# EAGLE board DBS (EAGLE 9.6.1)
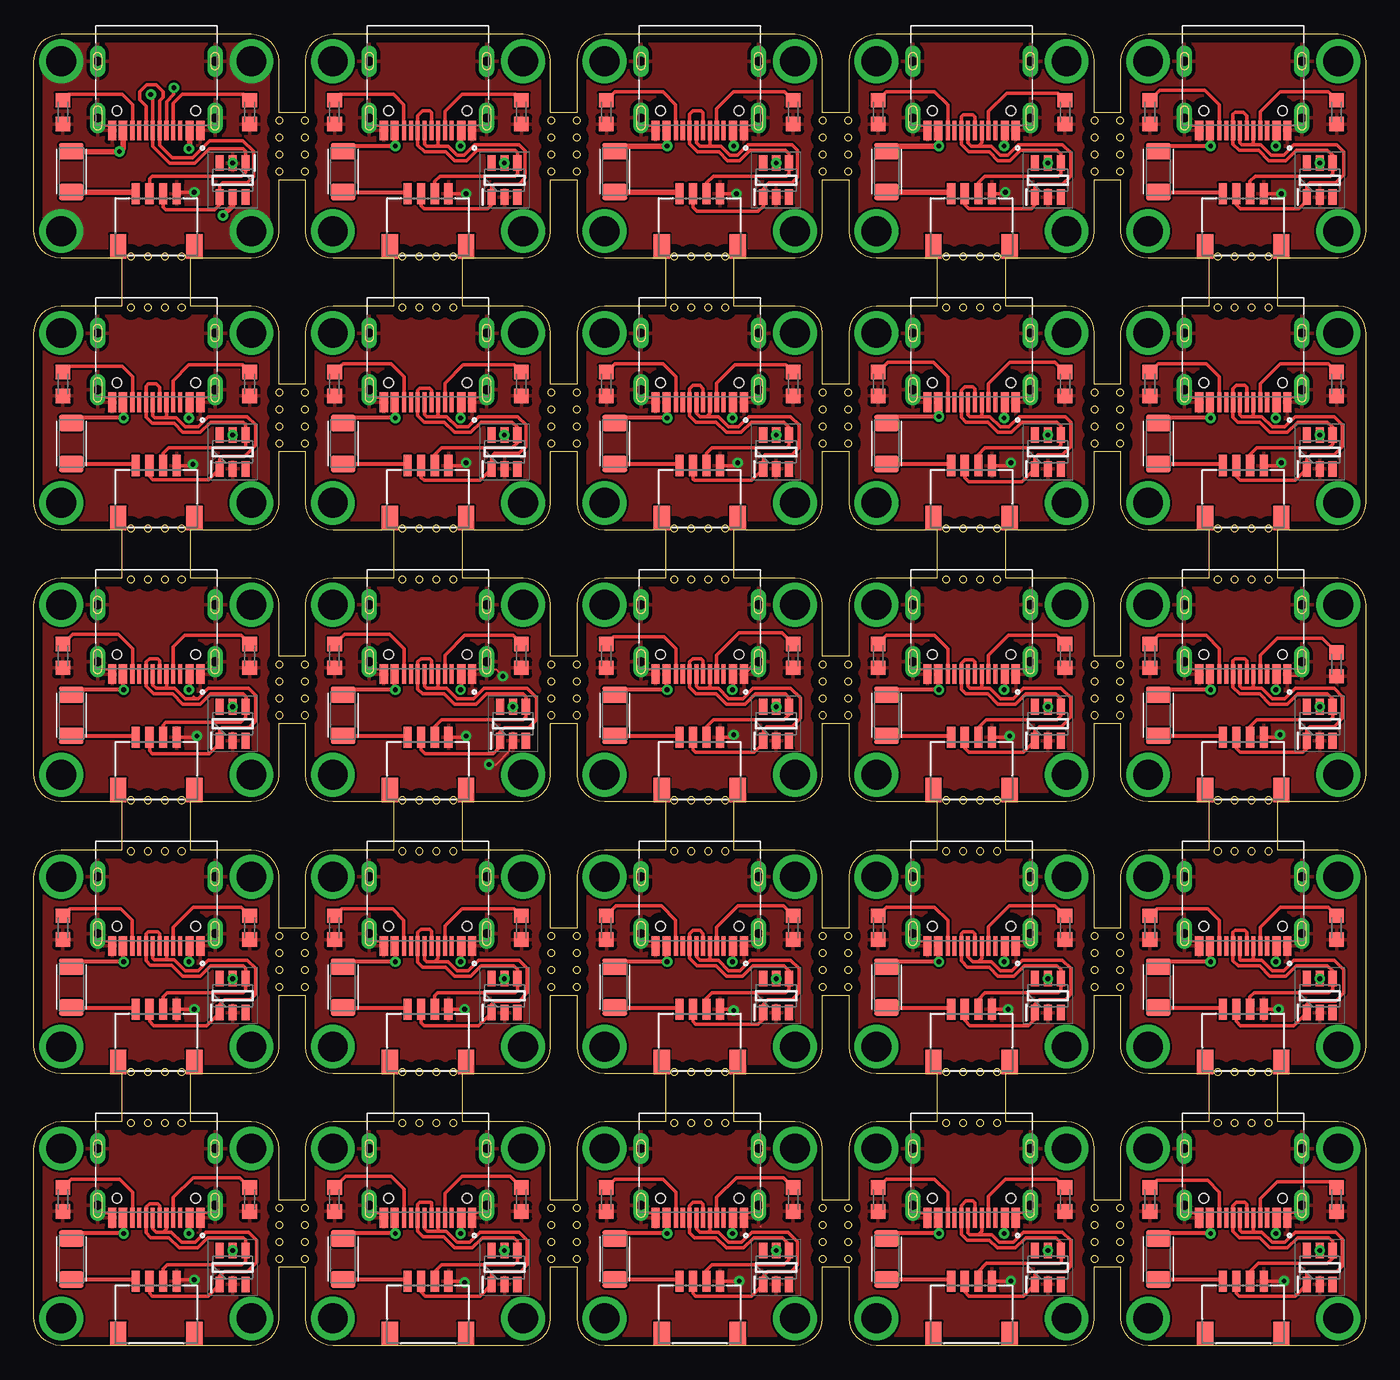
[diagram p0: board, top side]
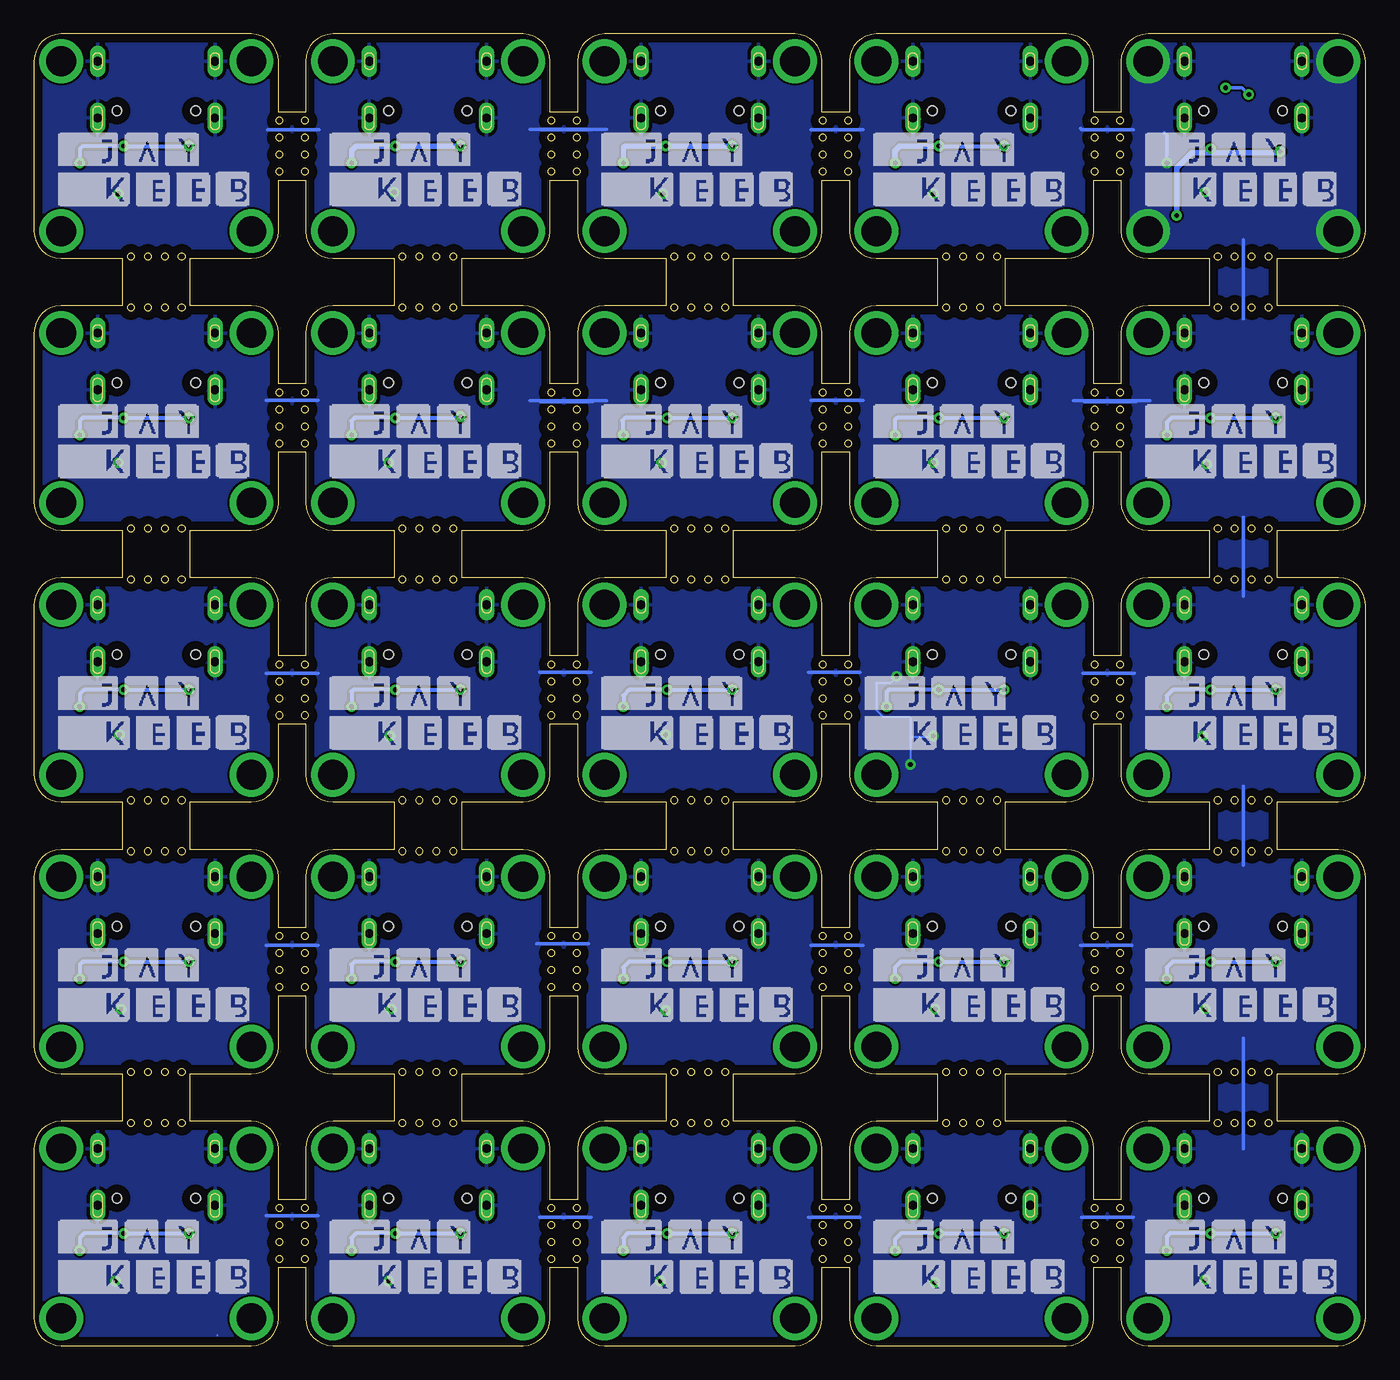
[diagram p1: board, bottom side, seen from below]

Size 98 x 96.5 mm. Coordinates in mm from the lower left corner, seen from the top.
Outline: 1060 segments
Outline: circle at 7.12,80.12 radius 0.25
Outline: circle at 8.37,80.12 radius 0.25
Outline: circle at 9.62,80.12 radius 0.25
Outline: circle at 10.87,80.12 radius 0.25
Outline: circle at 7.12,76.37 radius 0.25
Outline: circle at 8.37,76.37 radius 0.25
Outline: circle at 9.62,76.37 radius 0.25
Outline: circle at 10.87,76.37 radius 0.25
Outline: circle at 7.12,60.12 radius 0.25
Outline: circle at 8.37,60.12 radius 0.25
Outline: circle at 9.62,60.12 radius 0.25
Outline: circle at 10.87,60.12 radius 0.25
Outline: circle at 7.12,56.37 radius 0.25
Outline: circle at 8.37,56.37 radius 0.25
Outline: circle at 9.62,56.37 radius 0.25
Outline: circle at 10.87,56.37 radius 0.25
Outline: circle at 7.12,40.12 radius 0.25
Outline: circle at 8.37,40.12 radius 0.25
Outline: circle at 9.62,40.12 radius 0.25
Outline: circle at 10.87,40.12 radius 0.25
Copper layers (1*16): Top 0.035mm / dielectric 1.5mm / Bottom 0.035mm
Design rules "default *": minimum track width 6mil, minimum drill 0.35mm, track to track 6mil, track to pad 6mil, pad to pad 6mil, via to via 6mil, smd to smd 6mil, copper to edge 25mil, drill to drill 6mil, minimum pad ring 10mil, minimum via ring 8mil, stop-mask expansion 4mil, vias tented up to drill 14mil, thermal gap 10mil

## Footprints (pad centres in the part's own frame; a part is rotated, then mirrored left to right if it is on the bottom)
SOT95P280X145-6N = smd 1.15 x 0.6: 1 -1.25,0.95; 2 -1.25,0; 3 -1.25,-0.95; 4 1.25,-0.95; 5 1.25,0; 6 1.25,0.95
RESC3216X125N = smd 1.2 x 1.82: 1 -1.505,0; 2 1.505,0
HRO_TYPE-C-31-M-12 = smd 0.6 x 1.45: A1B12 -3.25,5.095; A4B9 -2.45,5.095; B1A12 3.25,5.095; B4A9 2.45,5.095 | smd 0.3 x 1.45: A5 -1.25,5.095; A6 -0.25,5.095; A7 0.25,5.095; A8 1.25,5.095; B5 1.75,5.095; B6 0.75,5.095; B7 -0.75,5.095; B8 -1.75,5.095 | drill 0.65 pad 1.05 long: S1 -4.32,4.18; S2 4.32,4.18; S3 -4.32,0; S4 4.32,0 | hole 0.7: -2.89,3.65; 2.89,3.65
R0603 = smd 1.05 x 1.08: 1 -0.875,0; 2 0.875,0
SM04B-SRSS-TB = smd 0.6 x 1.55: 1 1.5,0; 2 0.5,0; 3 -0.5,0; 4 -1.5,0 | smd 1.2 x 1.8: M1 2.8,3.875; M2 -2.8,3.875

## Placement (x,y rotation side)
E1  SRV05-4.TCT  [SOT95P280X145-6N]  14.62,85.75 270 top
E2  SRV05-4.TCT  [SOT95P280X145-6N]  34.62,85.75 90 top
E3  SRV05-4.TCT  [SOT95P280X145-6N]  54.62,85.75 90 top
E4  SRV05-4.TCT  [SOT95P280X145-6N]  74.62,85.75 90 top
E5  SRV05-4.TCT  [SOT95P280X145-6N]  94.62,85.75 90 top
E6  SRV05-4.TCT  [SOT95P280X145-6N]  14.62,65.75 90 top
E7  SRV05-4.TCT  [SOT95P280X145-6N]  34.62,65.75 90 top
E8  SRV05-4.TCT  [SOT95P280X145-6N]  54.62,65.75 90 top
E9  SRV05-4.TCT  [SOT95P280X145-6N]  74.62,65.75 90 top
E10  SRV05-4.TCT  [SOT95P280X145-6N]  94.62,65.75 90 top
E11  SRV05-4.TCT  [SOT95P280X145-6N]  14.62,45.75 90 top
E12  SRV05-4.TCT  [SOT95P280X145-6N]  35.25,45.75 90 top
E13  SRV05-4.TCT  [SOT95P280X145-6N]  54.62,45.75 90 top
E14  SRV05-4.TCT  [SOT95P280X145-6N]  74.62,45.75 90 top
E15  SRV05-4.TCT  [SOT95P280X145-6N]  94.62,45.75 90 top
E16  SRV05-4.TCT  [SOT95P280X145-6N]  14.62,25.75 90 top
E17  SRV05-4.TCT  [SOT95P280X145-6N]  34.62,25.75 90 top
E18  SRV05-4.TCT  [SOT95P280X145-6N]  54.62,25.75 90 top
E19  SRV05-4.TCT  [SOT95P280X145-6N]  74.62,25.75 90 top
E20  SRV05-4.TCT  [SOT95P280X145-6N]  94.62,25.75 90 top
E21  SRV05-4.TCT  [SOT95P280X145-6N]  14.62,5.75 90 top
E22  SRV05-4.TCT  [SOT95P280X145-6N]  34.62,5.75 90 top
E23  SRV05-4.TCT  [SOT95P280X145-6N]  54.62,5.75 90 top
E24  SRV05-4.TCT  [SOT95P280X145-6N]  74.62,5.75 90 top
E25  SRV05-4.TCT  [SOT95P280X145-6N]  94.62,5.75 90 top
F1  500mA  [RESC3216X125N]  2.75,86.37 90 top
F2  500mA  [RESC3216X125N]  22.75,86.37 90 top
F3  500mA  [RESC3216X125N]  42.75,86.37 90 top
F4  500mA  [RESC3216X125N]  62.75,86.37 90 top
F5  500mA  [RESC3216X125N]  82.75,86.37 90 top
F6  500mA  [RESC3216X125N]  2.75,66.37 90 top
F7  500mA  [RESC3216X125N]  22.75,66.37 90 top
F8  500mA  [RESC3216X125N]  42.75,66.37 90 top
F9  500mA  [RESC3216X125N]  62.75,66.37 90 top
F10  500mA  [RESC3216X125N]  82.75,66.37 90 top
F11  500mA  [RESC3216X125N]  2.75,46.37 90 top
F12  500mA  [RESC3216X125N]  22.75,46.37 90 top
F13  500mA  [RESC3216X125N]  42.75,46.37 90 top
F14  500mA  [RESC3216X125N]  62.75,46.37 90 top
F15  500mA  [RESC3216X125N]  82.75,46.37 90 top
F16  500mA  [RESC3216X125N]  2.75,26.37 90 top
F17  500mA  [RESC3216X125N]  22.75,26.37 90 top
F18  500mA  [RESC3216X125N]  42.75,26.37 90 top
F19  500mA  [RESC3216X125N]  62.75,26.37 90 top
F20  500mA  [RESC3216X125N]  82.75,26.37 90 top
F21  500mA  [RESC3216X125N]  2.75,6.37 90 top
F22  500mA  [RESC3216X125N]  22.75,6.37 90 top
F23  500mA  [RESC3216X125N]  42.75,6.37 90 top
F24  500mA  [RESC3216X125N]  62.75,6.37 90 top
F25  500mA  [RESC3216X125N]  82.75,6.37 90 top
J1  TYPE-C-31-M-12  [HRO_TYPE-C-31-M-12]  9,94.5 180 top
J2  TYPE-C-31-M-12  [HRO_TYPE-C-31-M-12]  49,94.5 180 top
J3  TYPE-C-31-M-12  [HRO_TYPE-C-31-M-12]  69,94.5 180 top
J4  TYPE-C-31-M-12  [HRO_TYPE-C-31-M-12]  89,94.5 180 top
J5  TYPE-C-31-M-12  [HRO_TYPE-C-31-M-12]  9,74.5 180 top
J6  TYPE-C-31-M-12  [HRO_TYPE-C-31-M-12]  29,74.5 180 top
J7  TYPE-C-31-M-12  [HRO_TYPE-C-31-M-12]  49,74.5 180 top
J8  TYPE-C-31-M-12  [HRO_TYPE-C-31-M-12]  69,74.5 180 top
J9  TYPE-C-31-M-12  [HRO_TYPE-C-31-M-12]  89,74.5 180 top
J10  TYPE-C-31-M-12  [HRO_TYPE-C-31-M-12]  9,54.5 180 top
J11  TYPE-C-31-M-12  [HRO_TYPE-C-31-M-12]  29,54.5 180 top
J12  TYPE-C-31-M-12  [HRO_TYPE-C-31-M-12]  49,54.5 180 top
J13  TYPE-C-31-M-12  [HRO_TYPE-C-31-M-12]  69,54.5 180 top
J14  TYPE-C-31-M-12  [HRO_TYPE-C-31-M-12]  89,54.5 180 top
J15  TYPE-C-31-M-12  [HRO_TYPE-C-31-M-12]  9,34.5 180 top
J16  TYPE-C-31-M-12  [HRO_TYPE-C-31-M-12]  29,34.5 180 top
J17  TYPE-C-31-M-12  [HRO_TYPE-C-31-M-12]  49,34.5 180 top
J18  TYPE-C-31-M-12  [HRO_TYPE-C-31-M-12]  69,34.5 180 top
J19  TYPE-C-31-M-12  [HRO_TYPE-C-31-M-12]  89,34.5 180 top
J20  TYPE-C-31-M-12  [HRO_TYPE-C-31-M-12]  9,14.5 180 top
J21  TYPE-C-31-M-12  [HRO_TYPE-C-31-M-12]  29,14.5 180 top
J22  TYPE-C-31-M-12  [HRO_TYPE-C-31-M-12]  49,14.5 180 top
J23  TYPE-C-31-M-12  [HRO_TYPE-C-31-M-12]  69,14.5 180 top
J24  TYPE-C-31-M-12  [HRO_TYPE-C-31-M-12]  89,14.5 180 top
J26  TYPE-C-31-M-12  [HRO_TYPE-C-31-M-12]  29,94.5 180 top
R1  5.1k  [R0603]  15.87,90.75 90 top
R2  5.1k  [R0603]  2.12,90.75 270 top
R3  5.1k  [R0603]  35.87,90.75 90 top
R4  5.1k  [R0603]  22.12,90.75 270 top
R5  5.1k  [R0603]  55.87,90.75 90 top
R6  5.1k  [R0603]  42.12,90.75 270 top
R7  5.1k  [R0603]  75.87,90.75 90 top
R8  5.1k  [R0603]  62.12,90.75 270 top
R9  5.1k  [R0603]  95.87,90.75 90 top
R10  5.1k  [R0603]  82.12,90.75 270 top
R11  5.1k  [R0603]  15.87,70.75 90 top
R12  5.1k  [R0603]  2.12,70.75 270 top
R13  5.1k  [R0603]  35.87,70.75 90 top
R14  5.1k  [R0603]  22.12,70.75 270 top
R15  5.1k  [R0603]  55.87,70.75 90 top
R16  5.1k  [R0603]  42.12,70.75 270 top
R17  5.1k  [R0603]  75.87,70.75 90 top
R18  5.1k  [R0603]  62.12,70.75 270 top
R19  5.1k  [R0603]  95.87,70.75 90 top
R20  5.1k  [R0603]  82.12,70.75 270 top
R21  5.1k  [R0603]  15.87,50.75 90 top
R22  5.1k  [R0603]  2.12,50.75 270 top
R23  5.1k  [R0603]  35.87,50.75 90 top
R24  5.1k  [R0603]  22.12,50.75 270 top
R25  5.1k  [R0603]  55.87,50.75 90 top
R26  5.1k  [R0603]  42.12,50.75 270 top
R27  5.1k  [R0603]  75.87,50.75 90 top
R28  5.1k  [R0603]  62.12,50.75 270 top
R29  5.1k  [R0603]  95.87,50.12 90 top
R30  5.1k  [R0603]  82.12,50.75 270 top
R31  5.1k  [R0603]  15.87,30.75 90 top
R32  5.1k  [R0603]  2.12,30.75 270 top
R33  5.1k  [R0603]  35.87,30.75 90 top
R34  5.1k  [R0603]  22.12,30.75 270 top
R35  5.1k  [R0603]  55.87,30.75 90 top
R36  5.1k  [R0603]  42.12,30.75 270 top
R37  5.1k  [R0603]  75.87,30.75 90 top
R38  5.1k  [R0603]  62.12,30.75 270 top
R39  5.1k  [R0603]  95.87,30.75 90 top
R40  5.1k  [R0603]  82.12,30.75 270 top
R41  5.1k  [R0603]  15.87,10.75 90 top
R42  5.1k  [R0603]  2.12,10.75 270 top
R43  5.1k  [R0603]  35.87,10.75 90 top
R44  5.1k  [R0603]  22.12,10.75 270 top
R45  5.1k  [R0603]  55.87,10.75 90 top
R46  5.1k  [R0603]  42.12,10.75 270 top
R47  5.1k  [R0603]  75.87,10.75 90 top
R48  5.1k  [R0603]  62.12,10.75 270 top
R49  5.1k  [R0603]  95.87,10.75 90 top
R50  5.1k  [R0603]  82.12,10.75 270 top
X1  SM04B-SRSS-TB  [SM04B-SRSS-TB]  9,84.75 180 top
X2  SM04B-SRSS-TB  [SM04B-SRSS-TB]  49,84.75 180 top
X3  SM04B-SRSS-TB  [SM04B-SRSS-TB]  69,84.75 180 top
X4  SM04B-SRSS-TB  [SM04B-SRSS-TB]  89,84.75 180 top
X5  SM04B-SRSS-TB  [SM04B-SRSS-TB]  9,64.75 180 top
X6  SM04B-SRSS-TB  [SM04B-SRSS-TB]  29,64.75 180 top
X7  SM04B-SRSS-TB  [SM04B-SRSS-TB]  49,64.75 180 top
X8  SM04B-SRSS-TB  [SM04B-SRSS-TB]  69,64.75 180 top
X9  SM04B-SRSS-TB  [SM04B-SRSS-TB]  89,64.75 180 top
X10  SM04B-SRSS-TB  [SM04B-SRSS-TB]  9,44.75 180 top
X11  SM04B-SRSS-TB  [SM04B-SRSS-TB]  29,44.75 180 top
X12  SM04B-SRSS-TB  [SM04B-SRSS-TB]  49,44.75 180 top
X13  SM04B-SRSS-TB  [SM04B-SRSS-TB]  69,44.75 180 top
X14  SM04B-SRSS-TB  [SM04B-SRSS-TB]  89,44.75 180 top
X15  SM04B-SRSS-TB  [SM04B-SRSS-TB]  9,24.75 180 top
X16  SM04B-SRSS-TB  [SM04B-SRSS-TB]  29,24.75 180 top
X17  SM04B-SRSS-TB  [SM04B-SRSS-TB]  49,24.75 180 top
X18  SM04B-SRSS-TB  [SM04B-SRSS-TB]  69,24.75 180 top
X19  SM04B-SRSS-TB  [SM04B-SRSS-TB]  89,24.75 180 top
X20  SM04B-SRSS-TB  [SM04B-SRSS-TB]  9,4.75 180 top
X21  SM04B-SRSS-TB  [SM04B-SRSS-TB]  29,4.75 180 top
X22  SM04B-SRSS-TB  [SM04B-SRSS-TB]  49,4.75 180 top
X23  SM04B-SRSS-TB  [SM04B-SRSS-TB]  69,4.75 180 top
X24  SM04B-SRSS-TB  [SM04B-SRSS-TB]  89,4.75 180 top
X26  SM04B-SRSS-TB  [SM04B-SRSS-TB]  29,84.75 180 top

## Library data of the parts
E1-E25 = SRV05-4.TCT; AVAILABILITY: In Stock; DESCRIPTION: 17.5V Clamp 12A (8/20µs) Ipp Tvs Diode Surface Mount SOT-23-6; MF: Semtech; MP: SRV05-4.TC; PACKAGE: SOT-23-6 Semtech; PRICE: None; PURCHASE-URL: https://pricing.snapeda.com/search/part/SRV05-4.TC/?ref=eda
F1-F25 = fuse; AVAILABILITY: In Stock; DESCRIPTION: 1206 SMT PPTC | 0.75 Ih | 16V; MF: Bel Fuse; MP: 0ZCJ0075AF2E; PACKAGE: 1206 Bel Fuse; PRICE: None; PURCHASE-URL: https://pricing.snapeda.com/search/part/0ZCJ0075AF2E/?ref=eda
J1-J24 J26 = TYPE-C-31-M-12; AVAILABILITY: Unavailable; DESCRIPTION: USB Connectors 24 Receptacle 1 8.94*7.3mm RoHS; MF: HRO Electronics Co., Ltd.; MP: TYPE-C-31-M-12; PACKAGE: Package; PRICE: None
R1-R50 = Components
X1-X24 X26 = con-JST SH

## Nets
DN1: E1.1 J1.A7 J1.B7 X1.2
DN2: E2.1 J26.A7 J26.B7 X26.2
DN3: E3.1 J2.A7 J2.B7 X2.2
DN4: E4.1 J3.A7 J3.B7 X3.2
DN5: E5.1 J4.A7 J4.B7 X4.2
DN6: E6.1 J5.A7 J5.B7 X5.2
DN7: E7.1 J6.A7 J6.B7 X6.2
DN8: E8.1 J7.A7 J7.B7 X7.2
DN9: E9.1 J8.A7 J8.B7 X8.2
DN10: E10.1 J9.A7 J9.B7 X9.2
DN11: E11.1 J10.A7 J10.B7 X10.2
DN12: E12.1 J11.A7 J11.B7 X11.2
DN13: E13.1 J12.A7 J12.B7 X12.2
DN14: E14.1 J13.A7 J13.B7 X13.2
DN15: E15.1 J14.A7 J14.B7 X14.2
DN16: E16.1 J15.A7 J15.B7 X15.2
DN17: E17.1 J16.A7 J16.B7 X16.2
DN18: E18.1 J17.A7 J17.B7 X17.2
DN19: E19.1 J18.A7 J18.B7 X18.2
DN20: E20.1 J19.A7 J19.B7 X19.2
DN21: E21.1 J20.A7 J20.B7 X20.2
DN22: E22.1 J21.A7 J21.B7 X21.2
DN23: E23.1 J22.A7 J22.B7 X22.2
DN24: E24.1 J23.A7 J23.B7 X23.2
DN25: E25.1 J24.A7 J24.B7 X24.2
DP1: E1.4 J1.A6 J1.B6 X1.3
DP2: E2.4 J26.A6 J26.B6 X26.3
DP3: E3.4 J2.A6 J2.B6 X2.3
DP4: E4.4 J3.A6 J3.B6 X3.3
DP5: E5.4 J4.A6 J4.B6 X4.3
DP6: E6.4 J5.A6 J5.B6 X5.3
DP7: E7.4 J6.A6 J6.B6 X6.3
DP8: E8.4 J7.A6 J7.B6 X7.3
DP9: E9.4 J8.A6 J8.B6 X8.3
DP10: E10.4 J9.A6 J9.B6 X9.3
DP11: E11.4 J10.A6 J10.B6 X10.3
DP12: E12.4 J11.A6 J11.B6 X11.3
DP13: E13.4 J12.A6 J12.B6 X12.3
DP14: E14.4 J13.A6 J13.B6 X13.3
DP15: E15.4 J14.A6 J14.B6 X14.3
DP16: E16.4 J15.A6 J15.B6 X15.3
DP17: E17.4 J16.A6 J16.B6 X16.3
DP18: E18.4 J17.A6 J17.B6 X17.3
DP19: E19.4 J18.A6 J18.B6 X18.3
DP20: E20.4 J19.A6 J19.B6 X19.3
DP21: E21.4 J20.A6 J20.B6 X20.3
DP22: E22.4 J21.A6 J21.B6 X21.3
DP23: E23.4 J22.A6 J22.B6 X22.3
DP24: E24.4 J23.A6 J23.B6 X23.3
DP25: E25.4 J24.A6 J24.B6 X24.3
GND: E1.2 E2.2 E3.2 E4.2 E5.2 E6.2 E7.2 E8.2 E9.2 E10.2 E11.2 E12.2 E13.2 E14.2 E15.2 E16.2 E17.2 E18.2 E19.2 E20.2 E21.2 E22.2 E23.2 E24.2 E25.2 J1.A1B12 J1.B1A12 J1.S1 J1.S2 J1.S3 J1.S4 J2.A1B12 J2.B1A12 J2.S1 J2.S2 J2.S3 J2.S4 J3.A1B12 J3.B1A12 J3.S1 J3.S2 J3.S3 J3.S4 J4.A1B12 J4.B1A12 J4.S1 J4.S2 J4.S3 J4.S4 J5.A1B12 J5.B1A12 J5.S1 J5.S2 J5.S3 J5.S4 J6.A1B12 J6.B1A12 J6.S1 J6.S2 J6.S3 J6.S4 J7.A1B12 J7.B1A12 J7.S1 J7.S2 J7.S3 J7.S4 J8.A1B12 J8.B1A12 J8.S1 J8.S2 J8.S3 J8.S4 J9.A1B12 J9.B1A12 J9.S1 J9.S2 J9.S3 J9.S4 J10.A1B12 J10.B1A12 J10.S1 J10.S2 J10.S3 J10.S4 J11.A1B12 J11.B1A12 J11.S1 J11.S2 J11.S3 J11.S4 J12.A1B12 J12.B1A12 J12.S1 J12.S2 J12.S3 J12.S4 J13.A1B12 J13.B1A12 J13.S1 J13.S2 J13.S3 J13.S4 J14.A1B12 J14.B1A12 J14.S1 J14.S2 J14.S3 J14.S4 J15.A1B12 J15.B1A12 J15.S1 J15.S2 J15.S3 J15.S4 J16.A1B12 J16.B1A12 J16.S1 J16.S2 J16.S3 J16.S4 J17.A1B12 J17.B1A12 J17.S1 J17.S2 J17.S3 J17.S4 J18.A1B12 J18.B1A12 J18.S1 J18.S2 J18.S3 J18.S4 J19.A1B12 J19.B1A12 J19.S1 J19.S2 J19.S3 J19.S4 J20.A1B12 J20.B1A12 J20.S1 J20.S2 J20.S3 J20.S4 J21.A1B12 J21.B1A12 J21.S1 J21.S2 J21.S3 J21.S4 J22.A1B12 J22.B1A12 J22.S1 J22.S2 J22.S3 J22.S4 J23.A1B12 J23.B1A12 J23.S1 J23.S2 J23.S3 J23.S4 J24.A1B12 J24.B1A12 J24.S1 J24.S2 J24.S3 J24.S4 J26.A1B12 J26.B1A12 J26.S1 J26.S2 J26.S3 J26.S4 R1.1 R2.2 R3.1 R4.2 R5.1 R6.2 R7.1 R8.2 R9.1 R10.2 R11.1 R12.2 R13.1 R14.2 R15.1 R16.2 R17.1 R18.2 R19.1 R20.2 R21.1 R22.2 R23.1 R24.2 R25.1 R26.2 R27.1 R28.2 R29.1 R30.2 R31.1 R32.2 R33.1 R34.2 R35.1 R36.2 R37.1 R38.2 R39.1 R40.2 R41.1 R42.2 R43.1 R44.2 R45.1 R46.2 R47.1 R48.2 R49.1 R50.2 X1.4 X2.4 X3.4 X4.4 X5.4 X6.4 X7.4 X8.4 X9.4 X10.4 X11.4 X12.4 X13.4 X14.4 X15.4 X16.4 X17.4 X18.4 X19.4 X20.4 X21.4 X22.4 X23.4 X24.4 X26.4
N$1: J1.A5 R1.2
N$2: J1.B5 R2.1
N$3: E2.5 F2.2 J26.A4B9 J26.B4A9
N$4: F2.1 X26.1
N$101: E1.5 F1.2 J1.A4B9 J1.B4A9
N$102: J26.A5 R3.2
N$103: F1.1 X1.1
N$104: J26.B5 R4.1
N$105: E3.5 F3.2 J2.A4B9 J2.B4A9
N$106: F3.1 X2.1
N$107: J2.A5 R5.2
N$108: J2.B5 R6.1
N$109: E4.5 F4.2 J3.A4B9 J3.B4A9
N$110: F4.1 X3.1
N$111: J3.A5 R7.2
N$112: J3.B5 R8.1
N$113: E5.5 F5.2 J4.A4B9 J4.B4A9
N$114: F5.1 X4.1
N$115: J4.A5 R9.2
N$116: J4.B5 R10.1
N$117: E6.5 F6.2 J5.A4B9 J5.B4A9
N$118: F6.1 X5.1
N$119: J5.A5 R11.2
N$120: J5.B5 R12.1
N$121: E7.5 F7.2 J6.A4B9 J6.B4A9
N$122: F7.1 X6.1
N$123: J6.A5 R13.2
N$124: J6.B5 R14.1
N$125: E8.5 F8.2 J7.A4B9 J7.B4A9
N$126: F8.1 X7.1
N$127: J7.A5 R15.2
N$128: J7.B5 R16.1
N$129: E9.5 F9.2 J8.A4B9 J8.B4A9
N$130: F9.1 X8.1
N$131: J8.A5 R17.2
N$132: J8.B5 R18.1
N$133: E10.5 F10.2 J9.A4B9 J9.B4A9
N$134: F10.1 X9.1
N$135: J9.A5 R19.2
N$136: J9.B5 R20.1
N$137: E11.5 F11.2 J10.A4B9 J10.B4A9
N$138: F11.1 X10.1
N$139: J10.A5 R21.2
N$140: J10.B5 R22.1
N$141: E12.5 F12.2 J11.A4B9 J11.B4A9
N$142: F12.1 X11.1
N$143: J11.A5 R23.2
N$144: J11.B5 R24.1
N$145: E13.5 F13.2 J12.A4B9 J12.B4A9
N$146: F13.1 X12.1
N$147: J12.A5 R25.2
N$148: J12.B5 R26.1
N$149: E14.5 F14.2 J13.A4B9 J13.B4A9
N$150: F14.1 X13.1
N$151: J13.A5 R27.2
N$152: J13.B5 R28.1
N$153: E15.5 F15.2 J14.A4B9 J14.B4A9
N$154: F15.1 X14.1
N$155: J14.A5 R29.2
N$156: J14.B5 R30.1
N$157: E16.5 F16.2 J15.A4B9 J15.B4A9
N$158: F16.1 X15.1
N$159: J15.A5 R31.2
N$160: J15.B5 R32.1
N$161: E17.5 F17.2 J16.A4B9 J16.B4A9
N$162: F17.1 X16.1
N$163: J16.A5 R33.2
N$164: J16.B5 R34.1
N$165: E18.5 F18.2 J17.A4B9 J17.B4A9
N$166: F18.1 X17.1
N$167: J17.A5 R35.2
N$168: J17.B5 R36.1
N$169: E19.5 F19.2 J18.A4B9 J18.B4A9
N$170: F19.1 X18.1
N$171: J18.A5 R37.2
N$172: J18.B5 R38.1
N$173: E20.5 F20.2 J19.A4B9 J19.B4A9
N$174: F20.1 X19.1
N$175: J19.A5 R39.2
N$176: J19.B5 R40.1
N$177: E21.5 F21.2 J20.A4B9 J20.B4A9
N$178: F21.1 X20.1
N$179: J20.A5 R41.2
N$180: J20.B5 R42.1
N$181: E22.5 F22.2 J21.A4B9 J21.B4A9
N$182: F22.1 X21.1
N$183: J21.A5 R43.2
N$184: J21.B5 R44.1
N$185: E23.5 F23.2 J22.A4B9 J22.B4A9
N$186: F23.1 X22.1
N$187: J22.A5 R45.2
N$188: J22.B5 R46.1
N$189: E24.5 F24.2 J23.A4B9 J23.B4A9
N$190: F24.1 X23.1
N$191: J23.A5 R47.2
N$192: J23.B5 R48.1
N$193: E25.5 F25.2 J24.A4B9 J24.B4A9
N$194: F25.1 X24.1
N$195: J24.A5 R49.2
N$196: J24.B5 R50.1

## Tracks (layer width: path | path; a pad name or v marks a point on that pad's centre or on a via)
DN1  (via drill 0.35)
  Top 0.254: X1.2 8.5,85.85 8.7,86.05 15.3,86.05 15.57,86.32 E1.1 15.57,87.87 15.4,88.05 12.9,88.05 11.84,86.99 9.99,86.99 8.75,88.22 J1.A7 8.75,91.9 v8.6,92.05 | J1.B7 9.75,91.5 10.3,92.05 v10.3,92.55
  Bottom 0.254: v10.3,92.55 9.1,92.55 v8.6,92.05
DN2
  Top 0.254: J26.B7 29.75,88.4 29.6,88.25 | J26.A7 28.75,88.4 28.9,88.25 29.6,88.25 | 29.6,88.25 30.47,88.25 31.13,87.59 31.67,87.59 32.44,88.36 35.69,88.36 36.15,87.9 36.15,85.9 35.7,85.45 33.9,85.45 33.67,85.22 E2.1 33.67,83.92 33.4,83.65 28.7,83.65 28.5,83.85 X26.2
DN3
  Top 0.254: J2.B7 49.75,88.3 49.7,88.25 | J2.A7 48.75,88.5 49,88.25 49.7,88.25 | 49.7,88.25 50.57,88.25 51.23,87.59 51.77,87.59 52.54,88.36 55.79,88.36 56.2,87.95 56.2,85.95 55.8,85.55 54.1,85.55 53.67,85.12 E3.1 53.67,83.82 53.3,83.45 48.8,83.45 48.5,83.75 X2.2
DN4
  Top 0.254: J3.A7 68.75,88.5 69,88.25 69.5,88.25 | J3.B7 69.75,88.5 69.5,88.25 | 69.5,88.25 70.47,88.25 71.13,87.59 71.67,87.59 72.44,88.36 75.69,88.36 76.3,87.75 76.3,86.05 75.7,85.45 73.9,85.45 73.67,85.22 E4.1 73.67,83.92 73.4,83.65 68.8,83.65 68.5,83.95 X3.2
DN5
  Top 0.254: J4.B7 89.75,88.5 89.6,88.35 | J4.A7 88.75,88.5 88.9,88.35 89.6,88.35 | 89.6,88.35 90.3,88.35 91.06,87.59 91.97,87.59 92.73,88.36 95.89,88.36 96.4,87.85 96.4,86.15 95.8,85.55 93.9,85.55 93.67,85.32 E5.1 93.67,84.22 93.1,83.65 88.8,83.65 88.5,83.95 X4.2
DN6
  Top 0.254: J5.B7 9.75,68.4 9.6,68.25 | J5.A7 8.75,68.4 8.9,68.25 9.6,68.25 | 9.6,68.25 10.47,68.25 11.13,67.59 12.07,67.59 12.83,68.36 15.69,68.36 16.3,67.75 16.3,66.25 15.5,65.45 13.9,65.45 13.67,65.22 E6.1 12.87,63.7 8.75,63.7 8.5,63.95 X5.2
DN7
  Top 0.254: J6.B7 29.75,68.5 29.6,68.35 | J6.A7 28.75,68.5 28.9,68.35 29.6,68.35 | 29.6,68.35 30.37,68.35 31.13,67.59 31.97,67.59 32.73,68.36 35.59,68.36 36.2,67.75 36.2,66.15 35.69,65.64 33.89,65.64 33.67,65.42 E7.1 32.82,63.65 28.7,63.65 28.5,63.85 X6.2
DN8
  Top 0.254: J7.A7 48.75,68.6 49,68.35 49.5,68.35 | J7.B7 49.75,68.6 49.5,68.35 | 49.5,68.35 50.37,68.35 51.13,67.59 51.87,67.59 52.63,68.36 55.69,68.36 56.3,67.75 56.3,66.05 55.8,65.55 53.8,65.55 53.67,65.42 E8.1 52.82,63.65 48.6,63.65 48.5,63.75 X7.2
DN9
  Top 0.254: J8.A7 68.75,68.5 68.9,68.35 69.6,68.35 | J8.B7 69.75,68.5 69.6,68.35 | 69.6,68.35 70.37,68.35 71.13,67.59 71.77,67.59 72.53,68.36 75.89,68.36 76.3,67.95 76.3,66.15 75.7,65.55 73.9,65.55 73.67,65.32 E9.1 72.72,63.55 68.8,63.55 68.5,63.85 X8.2
DN10
  Top 0.254: J9.A7 88.75,68.5 88.9,68.35 89.6,68.35 | J9.B7 89.75,68.5 89.6,68.35 | 89.6,68.35 90.37,68.35 91.13,67.59 92.07,67.59 92.83,68.36 95.69,68.36 96.3,67.75 96.3,66.15 95.7,65.55 94,65.55 93.67,65.22 E10.1 92.82,63.65 88.8,63.65 88.5,63.95 X9.2
DN11
  Top 0.254: J10.A7 8.75,48.6 9,48.35 9.6,48.35 | J10.B7 9.75,48.5 9.6,48.35 | 9.6,48.35 10.37,48.35 11.13,47.59 11.67,47.59 | 11.67,47.59 11.76,47.68 | 11.67,47.59 12.07,47.59 12.83,48.36 15.79,48.36 16.3,47.85 16.3,45.95 15.8,45.45 13.8,45.45 13.67,45.32 E11.1 13.67,44.32 12.9,43.55 8.7,43.55 8.5,43.75 X10.2
DN12
  Top 0.254: J11.B7 29.75,48.5 29.6,48.35 | J11.A7 28.75,48.5 28.9,48.35 29.6,48.35 | 29.6,48.35 30.37,48.35 31.13,47.59 32.37,47.59 33.13,48.36 36.29,48.36 37,47.65 37,46.05 36.4,45.45 34.6,45.45 34.3,45.15 E12.1 34.3,44.05 33.8,43.55 28.8,43.55 28.5,43.85 X11.2
DN13
  Top 0.254: J12.A7 48.75,48.5 48.9,48.35 49.6,48.35 | J12.B7 49.75,48.5 49.6,48.35 | 49.6,48.35 50.37,48.35 51.13,47.59 52.17,47.59 52.93,48.36 55.69,48.36 56.4,47.65 56.4,46.15 55.8,45.55 53.9,45.55 53.67,45.32 E13.1 53.67,44.32 53,43.65 48.7,43.65 48.5,43.85 X12.2
DN14
  Top 0.254: J13.A7 68.75,48.5 68.9,48.35 69.6,48.35 | J13.B7 69.75,48.5 69.6,48.35 | 69.6,48.35 70.37,48.35 71.13,47.59 72.07,47.59 72.83,48.36 75.59,48.36 76.3,47.65 76.3,46.25 75.6,45.55 74,45.55 73.67,45.22 E14.1 72.82,43.65 68.8,43.65 68.5,43.95 X13.2
DN15
  Top 0.254: J14.A7 88.75,48.5 88.9,48.35 89.6,48.35 | J14.B7 89.75,48.5 89.6,48.35 | 89.6,48.35 90.37,48.35 91.13,47.59 92.07,47.59 92.83,48.36 95.69,48.36 96.3,47.75 96.3,46.15 95.7,45.55 93.9,45.55 93.67,45.32 E15.1 93.67,43.92 93.4,43.65 88.8,43.65 88.5,43.95 X14.2
DN16
  Top 0.254: J15.A7 8.75,28.5 8.85,28.4 9.65,28.4 | J15.B7 9.75,28.5 9.65,28.4 | 9.65,28.4 10.32,28.4 11.13,27.59 12.07,27.59 12.83,28.36 15.69,28.36 16.3,27.75 16.3,25.85 15.9,25.45 14,25.45 13.67,25.12 E16.1 12.72,23.55 8.8,23.55 8.5,23.85 X15.2
DN17
  Top 0.254: J16.A7 28.75,28.4 28.9,28.25 29.5,28.25 | J16.B7 29.75,28.5 29.5,28.25 | 29.5,28.25 30.47,28.25 31.13,27.59 31.97,27.59 32.73,28.36 35.69,28.36 36.3,27.75 36.3,25.95 35.7,25.35 33.9,25.35 33.67,25.12 E17.1 32.72,23.55 28.7,23.55 28.5,23.75 X16.2
DN18
  Top 0.254: J17.B7 49.75,28.5 49.6,28.35 | J17.A7 48.75,28.6 49,28.35 49.6,28.35 | 49.6,28.35 50.37,28.35 51.13,27.59 51.97,27.59 52.73,28.36 55.69,28.36 56.3,27.75 56.3,25.95 55.8,25.45 54,25.45 53.67,25.12 E18.1 53.67,24.02 53.3,23.65 48.7,23.65 48.5,23.85 X17.2
DN19
  Top 0.254: J18.A7 68.75,28.6 69.1,28.25 69.5,28.25 | J18.B7 69.75,28.5 69.5,28.25 | 69.5,28.25 70.47,28.25 71.13,27.59 71.97,27.59 72.73,28.36 75.69,28.36 76.3,27.75 76.3,25.85 75.9,25.45 74,25.45 73.67,25.12 E19.1 73.67,24.02 73.2,23.55 68.9,23.55 68.5,23.95 X18.2
DN20
  Top 0.254: J19.A7 88.75,28.4 88.8,28.35 89.6,28.35 | J19.B7 89.75,28.5 89.6,28.35 | 89.6,28.35 90.37,28.35 91.13,27.59 91.97,27.59 92.73,28.36 95.69,28.36 96.4,27.65 96.4,25.95 95.8,25.35 95.16,25.35 95.15,25.35 95.04,25.35 93.9,25.35 93.67,25.12 E20.1 92.72,23.55 88.8,23.55 88.5,23.85 X19.2
DN21
  Top 0.254: J20.A7 8.75,8.6 9,8.35 9.5,8.35 | J20.B7 9.75,8.6 9.5,8.35 | 9.5,8.35 10.1,8.35 10.86,7.59 11.87,7.59 12.63,8.36 15.79,8.36 16.4,7.75 16.4,6.15 15.7,5.45 14,5.45 13.67,5.12 E21.1 12.82,3.65 8.7,3.65 8.5,3.85 X20.2
DN22
  Top 0.254: J21.A7 28.75,8.6 28.95,8.4 29.65,8.4 | J21.B7 29.75,8.5 29.65,8.4 | 29.65,8.4 30.32,8.4 31.13,7.59 32.07,7.59 32.83,8.36 35.69,8.36 36.3,7.75 36.3,5.95 35.8,5.45 33.8,5.45 33.67,5.32 E22.1 32.82,3.65 28.8,3.65 28.5,3.95 X21.2
DN23
  Top 0.254: J22.A7 48.75,8.6 49,8.35 49.6,8.35 | J22.B7 49.75,8.5 49.6,8.35 | 49.6,8.35 50.37,8.35 51.13,7.59 52.07,7.59 52.83,8.36 55.49,8.36 56.2,7.65 56.2,5.95 55.7,5.45 54,5.45 53.67,5.12 E23.1 52.82,3.65 48.7,3.65 48.5,3.85 X22.2
DN24
  Top 0.254: J23.A7 68.75,8.3 68.9,8.15 69.5,8.15 | J23.B7 69.75,8.4 69.5,8.15 | 69.5,8.15 70.5,8.15 71.06,7.59 72.07,7.59 72.83,8.36 75.69,8.36 76.3,7.75 76.3,5.85 75.9,5.45 73.9,5.45 73.67,5.22 E24.1 72.82,3.65 68.8,3.65 68.5,3.95 X23.2
DN25
  Top 0.254: J24.B7 89.75,8.4 89.7,8.35 | J24.A7 88.75,8.5 88.9,8.35 89.7,8.35 | 89.7,8.35 90.37,8.35 91.13,7.59 92.07,7.59 92.83,8.36 95.79,8.36 96.3,7.85 96.3,5.85 95.9,5.45 93.8,5.45 93.67,5.32 E25.1 92.82,3.65 88.7,3.65 88.5,3.85 X24.2
DP1
  Top 0.254: X1.3 9.5,83.75 9.7,83.55 13.3,83.55 13.67,83.92 E1.4 13.67,85.32 13.9,85.55 15.7,85.55 16.15,86 16.15,87.87 15.37,88.65 12.93,88.65 11.67,87.39 10.16,87.39 9.25,88.3 J1.A6 9.25,91.6 9.5,91.85 9.5,92.25 9,92.75 8.3,92.75 7.8,92.25 7.8,91.65 8.25,91.2 J1.B6
DP2
  Top 0.254: X26.3 29.5,85.65 29.9,86.05 35.4,86.05 35.57,86.22 E2.4 35.57,87.77 35.4,87.95 32.6,87.95 31.84,87.19 30.96,87.19 30.3,87.84 28.73,87.84 28.25,88.32 J26.B6 28.25,90.5 28.6,90.85 29.1,90.85 29.25,90.7 J26.A6
DP3
  Top 0.254: X2.3 49.5,85.55 50,86.05 55.4,86.05 55.57,86.22 E3.4 55.57,87.67 55.3,87.95 52.7,87.95 51.94,87.19 51.06,87.19 50.4,87.84 48.83,87.84 48.25,88.42 J2.B6 48.25,90.6 48.5,90.85 49.1,90.85 49.25,90.7 J2.A6
DP4
  Top 0.254: J3.A6 69.25,90.4 69.1,90.55 68.4,90.55 68.25,90.4 J3.B6 68.25,88.4 68.81,87.84 70.3,87.84 70.96,87.19 71.84,87.19 72.6,87.95 75.3,87.95 75.57,87.67 E4.4 75.57,86.22 75.4,86.05 70,86.05 69.5,85.55 X3.3
DP5
  Top 0.254: X4.3 89.5,85.65 89.9,86.05 95.4,86.05 95.57,86.22 E5.4 95.57,87.57 95.2,87.95 92.9,87.95 92.14,87.19 90.89,87.19 90.13,87.94 88.71,87.94 88.25,88.4 J4.B6 88.25,90.6 88.4,90.75 89,90.75 89.25,90.5 J4.A6
DP6
  Top 0.254: X5.3 9.5,65.65 9.9,66.05 15.5,66.05 15.57,66.12 E6.4 15.57,67.77 15.4,67.95 13,67.95 12.24,67.19 10.96,67.19 10.3,67.84 8.71,67.84 8.25,68.3 J5.B6 8.25,70.6 8.4,70.75 9,70.75 9.25,70.5 J5.A6
DP7
  Top 0.254: J6.A6 29.25,70.3 29.1,70.45 28.4,70.45 28.25,70.3 J6.B6 28.25,68.4 28.71,67.94 30.2,67.94 30.96,67.19 32.14,67.19 32.9,67.95 35.2,67.95 35.57,67.57 E7.4 35.57,66.42 35.2,66.05 30,66.05 29.5,65.55 X6.3
DP8
  Top 0.254: J7.A6 49.25,70.4 49,70.65 48.5,70.65 48.25,70.4 J7.B6 48.25,68.4 48.71,67.94 50.2,67.94 50.96,67.19 52.04,67.19 52.8,67.95 55.2,67.95 55.57,67.57 E8.4 55.57,66.22 55.4,66.05 49.9,66.05 49.5,65.65 X7.3
DP9
  Top 0.254: J8.A6 69.25,70.4 69.1,70.55 68.5,70.55 68.25,70.3 J8.B6 68.25,68.3 68.61,67.94 70.2,67.94 70.96,67.19 71.94,67.19 72.7,67.95 75.3,67.95 75.57,67.67 E9.4 75.57,66.22 75.4,66.05 70,66.05 69.5,65.55 X8.3
DP10
  Top 0.254: J9.A6 89.25,70.5 89.1,70.65 88.5,70.65 88.25,70.4 J9.B6 88.25,68.3 88.61,67.94 90.2,67.94 90.96,67.19 92.24,67.19 93,67.95 95.2,67.95 95.57,67.57 E10.4 95.57,66.32 95.3,66.05 90,66.05 89.5,65.55 X9.3
DP11
  Top 0.254: J10.A6 9.25,50.4 9.1,50.55 8.5,50.55 8.25,50.3 J10.B6 8.25,48.5 8.81,47.94 10.2,47.94 10.96,47.19 12.24,47.19 13,47.95 15.4,47.95 15.6,47.75 15.6,47.02 E11.4 15.57,46.22 15.21,45.86 9.71,45.86 9.5,45.65 X10.3
DP12
  Top 0.254: J11.A6 29.25,50.4 29.1,50.55 28.5,50.55 28.25,50.3 J11.B6 28.25,48.3 28.61,47.94 30.2,47.94 30.96,47.19 32.54,47.19 33.3,47.95 36,47.95 36.2,47.75 E12.4 36.2,46.25 36,46.05 30,46.05 29.5,45.55 X11.3
DP13
  Top 0.254: J12.A6 49.25,50.4 49.1,50.55 48.5,50.55 48.25,50.3 J12.B6 48.25,48.42 48.73,47.94 50.2,47.94 50.96,47.19 52.34,47.19 53.1,47.95 55.3,47.95 55.57,47.67 E13.4 55.57,46.42 55.2,46.05 50,46.05 49.5,45.55 X12.3
DP14
  Top 0.254: J13.A6 69.25,50.3 69.1,50.45 68.5,50.45 68.25,50.2 J13.B6 68.25,48.3 68.61,47.94 70.2,47.94 70.96,47.19 72.24,47.19 73,47.95 75.2,47.95 75.57,47.57 E14.4 75.57,46.32 75.3,46.05 70.1,46.05 69.5,45.45 X13.3
DP15
  Top 0.254: J14.A6 89.25,50.4 89.1,50.55 88.4,50.55 88.25,50.4 J14.B6 88.25,48.42 88.73,47.94 90.2,47.94 90.96,47.19 92.24,47.19 93,47.95 95.2,47.95 95.57,47.57 E15.4 95.57,46.22 95.4,46.05 90,46.05 89.5,45.55 X14.3
DP16
  Top 0.254: J15.A6 9.25,30.3 9.1,30.45 8.4,30.45 8.25,30.3 J15.B6 8.25,28.3 8.56,27.99 10.15,27.99 10.96,27.19 12.24,27.19 13,27.95 15.4,27.95 15.57,27.77 E16.4 15.57,26.12 15.4,25.95 9.8,25.95 9.5,25.65 X15.3
DP17
  Top 0.254: J16.A6 29.25,30.5 29.1,30.65 28.5,30.65 28.25,30.4 J16.B6 28.25,28.2 28.61,27.84 30.3,27.84 30.96,27.19 32.14,27.19 32.9,27.95 35.3,27.95 35.57,27.67 E17.4 35.57,26.12 35.4,25.95 29.7,25.95 29.5,25.75 X16.3
DP18
  Top 0.254: J17.A6 49.25,30.3 49,30.55 48.5,30.55 48.25,30.3 J17.B6 48.25,28.5 48.81,27.94 50.2,27.94 50.96,27.19 52.14,27.19 52.9,27.95 55.2,27.95 55.57,27.57 E18.4 55.57,26.22 55.3,25.95 49.9,25.95 49.5,25.55 X17.3
DP19
  Top 0.254: J18.A6 69.25,30.3 69.1,30.45 68.4,30.45 68.25,30.3 J18.B6 68.25,28.3 68.71,27.84 70.3,27.84 70.96,27.19 72.14,27.19 72.9,27.95 75.3,27.95 75.57,27.67 E19.4 75.57,26.12 75.4,25.95 70,25.95 69.5,25.45 X18.3
DP20
  Top 0.254: J19.A6 89.25,30.4 89.1,30.55 88.4,30.55 88.25,30.4 J19.B6 88.25,28.32 88.63,27.94 90.2,27.94 90.96,27.19 92.14,27.19 92.9,27.95 95.2,27.95 95.57,27.57 E20.4 95.57,26.22 95.3,25.95 89.8,25.95 89.5,25.65 X19.3
DP21
  Top 0.254: J20.A6 9.25,10.3 9.1,10.45 8.5,10.45 8.25,10.2 J20.B6 8.25,8.3 8.61,7.94 9.93,7.94 10.69,7.19 12.04,7.19 12.8,7.95 15.4,7.95 15.57,7.77 E21.4 15.57,6.22 15.3,5.95 9.8,5.95 9.5,5.65 X20.3
DP22
  Top 0.254: J21.A6 29.25,10.5 29.2,10.55 28.4,10.55 28.25,10.4 J21.B6 28.25,8.4 28.66,7.99 30.15,7.99 30.96,7.19 32.24,7.19 33,7.95 35.3,7.95 35.57,7.67 E22.4 35.57,6.22 35.3,5.95 30,5.95 29.5,5.45 X21.3
DP23
  Top 0.254: J22.A6 49.25,10.4 49.1,10.55 48.5,10.55 48.25,10.3 J22.B6 48.25,8.3 48.61,7.94 50.2,7.94 50.96,7.19 52.24,7.19 53,7.95 55.1,7.95 55.57,7.47 E23.4 55.57,6.32 55.2,5.95 49.9,5.95 49.5,5.55 X22.3
DP24
  Top 0.254: J23.A6 69.25,10.5 69.1,10.65 68.6,10.65 68.25,10.3 J23.B6 68.25,8.2 68.71,7.74 70.33,7.74 70.89,7.19 72.24,7.19 73,7.95 75.2,7.95 75.57,7.57 E24.4 75.6,6.97 75.6,6.15 75.5,6.05 70.1,6.05 69.5,5.45 X23.3
DP25
  Top 0.254: J24.A6 89.25,10.4 89.1,10.55 88.5,10.55 88.25,10.3 J24.B6 88.25,8.4 88.71,7.94 90.2,7.94 90.96,7.19 92.24,7.19 93,7.95 95.3,7.95 95.57,7.67 E25.4 95.57,6.42 95.2,6.05 90.1,6.05 89.5,5.45 X24.3
GND  (via drill 0.35, 2.2)
  Top 0.152: J8.B1A12 65.5,69.75 64.5,69.75 64.5,70.25 J8.S2 | J8.A1B12 72.5,69.75 73.5,69.75 73.5,70.25 J8.S1 | J9.B1A12 85.5,69.75 84.5,69.75 84.5,70.25 J9.S2 | J9.A1B12 92.5,69.75 93.5,69.75 93.5,70.25 J9.S1 | J3.B1A12 65.5,89.75 64.5,89.75 64.5,90.25 J3.S2 | J3.A1B12 72.5,89.75 73.5,89.75 73.5,90.25 J3.S1 | J4.B1A12 85.5,89.75 84.5,89.75 84.5,90.25 J4.S2 | J4.A1B12 92.5,89.75 93.5,89.75 93.5,90.25 J4.S1 | v33.5,42.75 34,42.75 35,43.75 35,44.25 E12.2 | J15.B1A12 5.5,29.75 4.5,29.75 4.5,30.25 J15.S2 | J15.A1B12 12.5,29.75 13.5,29.75 13.5,30.25 J15.S1 | J10.B1A12 5.5,49.75 4.5,49.75 4.5,50.25 J10.S2 | J10.A1B12 12.5,49.75 13.5,49.75 13.5,50.25 J10.S1 | J16.B1A12 25.5,29.75 24.5,29.75 24.5,30.25 J16.S2 | J11.B1A12 25.5,49.75 24.5,49.75 24.5,50.25 J11.S2 | J16.A1B12 32.5,29.75 33.5,29.75 33.5,30.25 J16.S1 | J17.B1A12 45.5,29.75 44.5,29.75 44.5,30.25 J17.S2 | J12.B1A12 45.5,49.75 44.5,49.75 44.5,50.25 J12.S2 | J17.A1B12 52.5,29.75 53.5,29.75 53.5,30.25 J17.S1 | J18.B1A12 65.5,29.75 64.5,29.75 64.5,30.25 J18.S2 | J13.B1A12 65.5,49.75 64.5,49.75 64.5,50.25 J13.S2 | J18.A1B12 72.5,29.75 73.5,29.75 73.5,30.25 J18.S1 | J13.A1B12 72.5,49.75 73.5,49.75 73.5,50.25 J13.S1 | J19.B1A12 85.5,29.75 84.5,29.75 84.5,30.25 J19.S2 | J14.B1A12 85.5,49.75 84.5,49.75 84.5,50.25 J14.S2 | J19.A1B12 92.5,29.75 93.5,29.75 93.5,30.25 J19.S1 | J14.A1B12 92.5,49.25 93.5,49.25 93.5,50.25 J14.S1 | v34.5,49.25 34,49.75 32.5,49.75 J11.A1B12 | J20.B1A12 5.5,9.75 4.5,9.75 4.5,10.25 J20.S2 | J20.A1B12 12.5,9.75 13.5,9.75 13.5,10.25 J20.S1 | J21.B1A12 25.5,9.75 24.5,9.75 24.5,10.25 J21.S2 | J21.A1B12 32.5,9.75 33.5,9.75 33.5,10.25 J21.S1
  Top 0.152: J22.B1A12 45.5,9.75 44.5,9.75 44.5,10.25 J22.S2 | J22.A1B12 52.5,9.75 53.5,9.75 53.5,10.25 J22.S1 | J23.B1A12 65.5,9.75 64.5,9.75 64.5,10.25 J23.S2 | J23.A1B12 72.5,9.75 73.5,9.75 73.5,10.25 J23.S1 | J24.B1A12 85.5,9.75 84.5,9.75 84.5,10.25 J24.S2 | J24.A1B12 92.5,9.75 93.5,9.75 93.5,10.25 J24.S1 | J6.B1A12 25.5,69.75 24.5,69.75 24.5,70.25 J6.S2 | J6.A1B12 32.5,69.75 33.5,69.75 33.5,70.25 J6.S1 | J7.B1A12 45.5,69.75 44.5,69.75 44.5,70.25 J7.S2 | J7.A1B12 52.5,69.75 53.5,69.75 53.5,70.25 J7.S1 | J5.B1A12 5.5,69.75 4.5,69.75 4.5,70.25 J5.S2 | J5.A1B12 12.5,69.75 13.5,69.75 13.5,70.25 J5.S1 | J1.B1A12 5.5,89.75 4.5,89.75 4.5,90.25 J1.S2 | J1.A1B12 12.5,89.75 13.5,89.75 13.5,90.25 J1.S1 | J26.B1A12 25.5,89.75 24.5,89.75 24.5,90.25 J26.S2 | J26.A1B12 32.5,89.75 33.5,89.75 33.5,90.25 J26.S1 | J2.B1A12 45.5,89.75 44.5,89.75 44.5,90.25 J2.S2 | J2.A1B12 52.5,89.75 53.5,89.75 53.5,90.25 J2.S1 | 53.5,8.75 53.5,8.76 | 55.5,9.75 R45.1
  Top 0.254: X1.4 10.6,84.85 v11.8,84.85 | X26.4 v31.8,84.75 | X20.4 10.6,4.85 v11.8,4.85 | X21.4 31.6,4.75 v31.7,4.65 | X22.4 v51.9,4.75 | X23.4 v71.9,4.75 | X24.4 v92,4.75 | X19.4 v91.6,24.75 | X18.4 v71.7,24.75 | X17.4 51.4,24.75 v51.5,24.65 | X16.4 v31.7,24.75 | X15.4 v11.8,24.75 | X10.4 11.9,44.75 v12,44.85 | X11.4 31.7,44.75 v31.8,44.85 | X12.4 51.3,44.75 v51.5,44.95 | X13.4 71.7,44.75 v71.8,44.85 | X14.4 91.5,44.75 v91.7,44.95 | X9.4 91.6,64.75 v91.8,64.95 | X8.4 71.7,64.75 v71.9,64.95 | X7.4 51.6,64.75 v51.8,64.95 | X6.4 31.6,64.75 v31.8,64.95 | X5.4 11.6,64.75 v11.7,64.85 | X2.4 v51.7,84.75 | X3.4 71.4,84.75 v71.5,84.85 | X4.4 v91.8,84.75 | J12.A1B12 53.16,50.32 J12.S1
  Bottom 0.152: 33.5,44.75 v33.5,42.75 | 33.5,44.75 32,44.75 v31.8,44.85 | 33.5,44.75 33.5,46.25 35.5,46.25 36,46.75 36,48.75 35,48.75 v34.5,49.25 | 84.5,0.75 84.5,0.77
  Bottom 0.254: E1.2 14.62,89.07 14.8,89.25 | 17.1,89.45 20.9,89.45 21,89.55 | 37,89.45 40.8,89.45 | 56.9,89.45 60.7,89.45 | 77,89.45 80.8,89.45 | 77.1,69.55 80.9,69.55 | 56.9,69.45 60.7,69.45 | 37,69.55 40.8,69.55 | 16.9,69.45 20.7,69.45 | 17,49.45 20.8,49.45 | 37.2,49.55 41,49.55 | 57,49.55 60.8,49.55 | 77.1,49.45 80.9,49.45 | 77.1,29.45 80.9,29.45 | 57.2,29.55 61,29.55 | 37,29.45 40.8,29.45 | 17.2,29.45 21,29.45 | 17.1,9.45 20.9,9.45 | 37.2,9.45 41,9.45 | 57,9.45 60.8,9.45 | 77.1,9.55 80.9,9.55 | 9,81.35 9,75.55 | 9,20.85 9,15.05 | 9,41.15 9,35.35 | 55.87,89.5 61.5,89.5 | 55.87,69.5 61.5,69.5 | 15.87,69.5 21.5,69.5 | 9,60.95 9,55.15 | 9,22.62 9,14.5
  other vias: 2,94.5 16,94.5 16,82 2,82 14.62,87
  pour Bottom: -6,103.25 104,103.25 104,-1.13 -6,-1.13
  pour Top: -11,108.25 109,108.25 109,-6.75 -11,-6.75
N$1
  Top 0.254: J1.A5 10.25,91.4 10.9,92.05 15.45,92.05 R1.2
N$2
  Top 0.254: J1.B5 7.25,91.28 6.48,92.05 2.55,92.05 R2.1
N$3  (via drill 0.35)
  Top 0.305: J26.A4B9 31.45,88.3 v31.4,88.25 | J26.B4A9 26.55,88.3 v26.6,88.25 23.12,88.25 F2.2
  Bottom 0.305: v31.4,88.25 v26.6,88.25
  Bottom 0.406: v31.4,88.25 34.3,88.25 34.62,87.92 E2.5
  other vias: 34.62,87
N$4
  Top 0.305: F2.1 27.38,84.87 X26.1
N$5  (via drill 2.2)
  other vias: 2,74.5
N$6  (via drill 2.2)
  other vias: 16,74.5
N$7  (via drill 2.2)
  other vias: 2,62
N$8  (via drill 2.2)
  other vias: 16,62
N$9  (via drill 2.2)
  other vias: 2,54.5
N$10  (via drill 2.2)
  other vias: 16,54.5
N$11  (via drill 2.2)
  other vias: 2,42
N$12  (via drill 2.2)
  other vias: 16,42
N$13  (via drill 2.2)
  other vias: 2,34.5
N$14  (via drill 2.2)
  other vias: 16,34.5
N$15  (via drill 2.2)
  other vias: 2,22
N$16  (via drill 2.2)
  other vias: 16,22
N$17  (via drill 2.2)
  other vias: 2,14.5
N$18  (via drill 2.2)
  other vias: 16,14.5
N$19  (via drill 2.2)
  other vias: 2,2
N$20  (via drill 2.2)
  other vias: 16,2
N$21  (via drill 2.2)
  other vias: 22,14.5
N$22  (via drill 2.2)
  other vias: 36,14.5
N$23  (via drill 2.2)
  other vias: 22,2
N$24  (via drill 2.2)
  other vias: 36,2
N$25  (via drill 2.2)
  other vias: 22,34.5
N$26  (via drill 2.2)
  other vias: 36,34.5
N$27  (via drill 2.2)
  other vias: 22,22
N$28  (via drill 2.2)
  other vias: 36,22
N$29  (via drill 2.2)
  other vias: 22,54.5
N$30  (via drill 2.2)
  other vias: 36,54.5
N$31  (via drill 2.2)
  other vias: 22,42
N$32  (via drill 2.2)
  other vias: 36,42
N$33  (via drill 2.2)
  other vias: 22,74.5
N$34  (via drill 2.2)
  other vias: 36,74.5
N$35  (via drill 2.2)
  other vias: 22,62
N$36  (via drill 2.2)
  other vias: 36,62
N$37  (via drill 2.2)
  other vias: 22,94.5
N$38  (via drill 2.2)
  other vias: 36,94.5
N$39  (via drill 2.2)
  other vias: 22,82
N$40  (via drill 2.2)
  other vias: 36,82
N$41  (via drill 2.2)
  other vias: 42,94.5
N$42  (via drill 2.2)
  other vias: 56,94.5
N$43  (via drill 2.2)
  other vias: 42,82
N$44  (via drill 2.2)
  other vias: 56,82
N$45  (via drill 2.2)
  other vias: 42,74.5
N$46  (via drill 2.2)
  other vias: 56,74.5
N$47  (via drill 2.2)
  other vias: 42,62
N$48  (via drill 2.2)
  other vias: 56,62
N$49  (via drill 2.2)
  other vias: 42,54.5
N$50  (via drill 2.2)
  other vias: 56,54.5
N$51  (via drill 2.2)
  other vias: 42,42
N$52  (via drill 2.2)
  other vias: 56,42
N$53  (via drill 2.2)
  other vias: 42,34.5
N$54  (via drill 2.2)
  other vias: 56,34.5
N$55  (via drill 2.2)
  other vias: 42,22
N$56  (via drill 2.2)
  other vias: 56,22
N$57  (via drill 2.2)
  other vias: 42,14.5
N$58  (via drill 2.2)
  other vias: 56,14.5
N$59  (via drill 2.2)
  other vias: 42,2
N$60  (via drill 2.2)
  other vias: 56,2
N$61  (via drill 2.2)
  other vias: 62,14.5
N$62  (via drill 2.2)
  other vias: 76,14.5
N$63  (via drill 2.2)
  other vias: 62,2
N$64  (via drill 2.2)
  other vias: 76,2
N$65  (via drill 2.2)
  other vias: 82,14.5
N$66  (via drill 2.2)
  other vias: 96,14.5
N$67  (via drill 2.2)
  other vias: 82,2
N$68  (via drill 2.2)
  other vias: 96,2
N$69  (via drill 2.2)
  other vias: 82,34.5
N$70  (via drill 2.2)
  other vias: 96,34.5
N$71  (via drill 2.2)
  other vias: 82,22
N$72  (via drill 2.2)
  other vias: 96,22
N$73  (via drill 2.2)
  other vias: 62,34.5
N$74  (via drill 2.2)
  other vias: 76,34.5
N$75  (via drill 2.2)
  other vias: 62,22
N$76  (via drill 2.2)
  other vias: 76,22
N$77  (via drill 2.2)
  other vias: 62,54.5
N$78  (via drill 2.2)
  other vias: 76,54.5
N$79  (via drill 2.2)
  other vias: 62,42
N$80  (via drill 2.2)
  other vias: 76,42
N$81  (via drill 2.2)
  other vias: 62,74.5
N$82  (via drill 2.2)
  other vias: 76,74.5
N$83  (via drill 2.2)
  other vias: 62,62
N$84  (via drill 2.2)
  other vias: 76,62
N$85  (via drill 2.2)
  other vias: 62,94.5
N$86  (via drill 2.2)
  other vias: 76,94.5
N$87  (via drill 2.2)
  other vias: 62,82
N$88  (via drill 2.2)
  other vias: 76,82
N$89  (via drill 2.2)
  other vias: 82,94.5
N$90  (via drill 2.2)
  other vias: 96,94.5
N$91  (via drill 2.2)
  other vias: 82,82
N$92  (via drill 2.2)
  other vias: 96,82
N$93  (via drill 2.2)
  other vias: 82,74.5
N$94  (via drill 2.2)
  other vias: 96,74.5
N$95  (via drill 2.2)
  other vias: 82,62
N$96  (via drill 2.2)
  other vias: 96,62
N$97  (via drill 2.2)
  other vias: 82,54.5
N$98  (via drill 2.2)
  other vias: 96,54.5
N$99  (via drill 2.2)
  other vias: 82,42
N$100  (via drill 2.2)
  other vias: 96,42
N$101  (via drill 0.35)
  Top 0.406: J1.B4A9 6.55,88.1 v6.3,87.85 2.78,87.85 F1.2 | J1.A4B9 11.45,88.1 v11.4,88.05 | v13.9,83.15 14.62,83.87 E1.5
  Bottom 0.406: v11.4,88.05 11.1,87.75 | v6.3,87.85 6.4,87.75 11.1,87.75 | 11.1,87.75 12.8,87.75 13.9,86.65 v13.9,83.15
N$102
  Top 0.254: J26.A5 30.25,90.8 31.5,92.05 35.45,92.05 R3.2
N$103
  Top 0.406: F1.1 7.38,84.87 X1.1
N$104
  Top 0.254: J26.B5 27.22,89.43 27.22,91.31 26.48,92.05 22.55,92.05 R4.1
N$105  (via drill 0.35)
  Top 0.406: J2.A4B9 51.45,88.3 v51.5,88.25 | J2.B4A9 46.55,88.3 v46.6,88.25 43.12,88.25 F3.2
  Bottom 0.406: v46.6,88.25 v51.5,88.25 54.5,88.25 54.62,88.12 E3.5
  other vias: 54.62,87
N$106
  Top 0.406: F3.1 47.38,84.87 X2.1
N$107
  Top 0.254: J2.A5 50.25,91 51.5,92.25 55.25,92.25 R5.2
N$108
  Top 0.254: J2.B5 47.22,89.43 47.22,91.31 46.28,92.25 42.75,92.25 R6.1
N$109  (via drill 0.35)
  Top 0.406: J3.A4B9 71.45,88.3 v71.4,88.25 | J3.B4A9 66.6,89.35 v66.6,88.25 63.12,88.25 F4.2
  Bottom 0.406: v66.6,88.25 v71.4,88.25 74.3,88.25 74.62,87.92 E4.5
  other vias: 74.62,87
N$110
  Top 0.406: F4.1 67.38,84.87 X3.1
N$111
  Top 0.254: J3.A5 70.25,90.8 71.6,92.15 75.35,92.15 R7.2
N$112
  Top 0.254: J3.B5 67.25,91.28 66.28,92.25 62.75,92.25 R8.1
N$113  (via drill 0.35)
  Top 0.305: J4.A4B9 91.45,88.3 v91.4,88.25 | J4.B4A9 86.55,88.3 v86.6,88.25 83.12,88.25 F5.2
  Bottom 0.305: v86.6,88.25 v91.4,88.25 94.4,88.25 94.62,88.02 E5.5
  other vias: 94.62,87
N$114
  Top 0.305: F5.1 87.38,84.87 X4.1
N$115
  Top 0.254: J4.A5 90.25,90.78 91.72,92.25 95.25,92.25 R9.2
N$116
  Top 0.254: J4.B5 87.25,91.28 86.18,92.35 82.85,92.35 R10.1
N$117  (via drill 0.35)
  Top 0.305: J5.A4B9 11.45,68.3 v11.4,68.25 | J5.B4A9 6.55,68.3 v6.6,68.25 3.12,68.25 F6.2
  Bottom 0.305: v6.6,68.25 v11.4,68.25 14.3,68.25 14.62,67.92 E6.5
  other vias: 14.62,67
N$118
  Top 0.305: F6.1 7.38,64.87 X5.1
N$119
  Top 0.254: J5.A5 10.25,71 11.4,72.15 15.35,72.15 R11.2
N$120
  Top 0.254: J5.B5 7.25,71.28 6.48,72.05 2.55,72.05 R12.1
N$121  (via drill 0.35)
  Top 0.305: J6.A4B9 31.45,68.3 v31.4,68.25 | J6.B4A9 26.55,68.3 v26.6,68.25 23.12,68.25 F7.2
  Bottom 0.305: v26.6,68.25 v31.4,68.25 34.5,68.25 34.62,68.12 E7.5
  other vias: 34.62,67
N$122
  Top 0.305: F7.1 27.38,64.87 X6.1
N$123
  Top 0.254: J6.A5 30.25,70.8 31.6,72.15 35.35,72.15 R13.2
N$124
  Top 0.254: J6.B5 27.25,71.28 26.28,72.25 22.75,72.25 R14.1
N$125  (via drill 0.35)
  Top 0.305: J7.A4B9 51.45,68.3 v51.4,68.25 | J7.B4A9 46.55,68.3 v46.6,68.25 43.12,68.25 F8.2
  Bottom 0.305: v46.6,68.25 v51.4,68.25 54.5,68.25 54.7,68.05 54.7,67.07 E8.5
  other vias: 54.62,67
N$126
  Top 0.305: F8.1 47.38,64.87 X7.1
N$127
  Top 0.254: J7.A5 50.25,70.8 51.6,72.15 55.35,72.15 R15.2
N$128
  Top 0.254: J7.B5 47.25,71.28 46.28,72.25 42.75,72.25 R16.1
N$129  (via drill 0.35)
  Top 0.305: J8.A4B9 71.45,68.3 v71.4,68.25 | J8.B4A9 66.55,68.4 v66.6,68.35 63.22,68.35 F9.2
  Bottom 0.305: v66.6,68.35 66.7,68.25 v71.4,68.25 74.4,68.25 74.62,68.02 E9.5
  other vias: 74.62,67
N$130
  Top 0.305: F9.1 67.38,64.87 X8.1
N$131
  Top 0.254: J8.A5 70.25,70.78 71.82,72.35 75.15,72.35 R17.2
N$132
  Top 0.254: J8.B5 67.25,71.3 66.2,72.35 62.85,72.35 R18.1
N$133  (via drill 0.35)
  Top 0.305: J9.A4B9 91.45,68.3 v91.4,68.25 | J9.B4A9 86.55,68.3 v86.6,68.25 83.12,68.25 F10.2
  Bottom 0.305: v86.6,68.25 v91.4,68.25 94.4,68.25 94.62,68.02 E10.5
  other vias: 94.62,67
N$134
  Top 0.305: F10.1 87.38,64.87 X9.1
N$135
  Top 0.254: J9.A5 90.25,70.78 91.72,72.25 95.25,72.25 R19.2
N$136
  Top 0.254: J9.B5 87.25,71.28 86.28,72.25 82.75,72.25 R20.1
N$137  (via drill 0.35)
  Top 0.305: J10.A4B9 11.45,48.3 v11.4,48.25 | J10.B4A9 6.55,48.3 v6.6,48.25 3.12,48.25 F11.2
  Bottom 0.305: v6.6,48.25 v11.4,48.25 14.2,48.25 14.62,47.82 E11.5
  other vias: 14.62,47
N$138
  Top 0.305: F11.1 7.38,44.87 X10.1
N$139
  Top 0.254: J10.A5 10.25,51.4 11.1,52.25 15.25,52.25 R21.2
N$140
  Top 0.254: J10.B5 7.25,51.28 6.18,52.35 2.85,52.35 R22.1
N$141  (via drill 0.35)
  Top 0.305: J11.A4B9 31.45,48.3 v31.4,48.25 | J11.B4A9 26.55,48.3 v26.6,48.25 23.12,48.25 F12.2
  Bottom 0.305: v26.6,48.25 v31.4,48.25 35.1,48.25 35.25,48.1 E12.5
  other vias: 35.25,47
N$142
  Top 0.305: F12.1 27.38,44.87 X11.1
N$143
  Top 0.254: J11.A5 30.25,50.8 31.7,52.25 35.25,52.25 R23.2
N$144
  Top 0.254: J11.B5 27.25,51.28 26.18,52.35 22.85,52.35 R24.1
N$145  (via drill 0.35)
  Top 0.305: J12.A4B9 51.45,48.3 v51.4,48.25 | J12.B4A9 46.55,48.3 v46.6,48.25 43.12,48.25 F13.2
  Bottom 0.305: v46.6,48.25 v51.4,48.25 54.2,48.25 54.62,47.82 E13.5
  other vias: 54.62,47
N$146
  Top 0.305: F13.1 47.38,44.87 X12.1
N$147
  Top 0.254: J12.A5 50.25,50.8 51.9,52.45 55.05,52.45 R25.2
N$148
  Top 0.254: J12.B5 47.25,51.28 46.38,52.15 42.65,52.15 R26.1
N$149  (via drill 0.35)
  Top 0.305: J13.A4B9 71.45,48.3 v71.4,48.25 | J13.B4A9 66.55,48.3 v66.6,48.25 63.12,48.25 F14.2
  Bottom 0.305: v66.6,48.25 v71.4,48.25 74.5,48.25 74.62,48.12 E14.5
  other vias: 74.62,47
N$150
  Top 0.305: F14.1 67.38,44.87 X13.1
N$151
  Top 0.254: J13.A5 70.25,50.78 71.72,52.25 75.25,52.25 R27.2
N$152
  Top 0.254: J13.B5 67.25,51.28 66.28,52.25 62.75,52.25 R28.1
N$153  (via drill 0.35)
  Top 0.305: J14.A4B9 91.45,48.3 v91.4,48.25 | J14.B4A9 86.55,48.3 v86.6,48.25 83.12,48.25 F15.2
  Bottom 0.305: v86.6,48.25 v91.4,48.25 94.3,48.25 94.62,47.92 E15.5
  other vias: 94.62,47
N$154
  Top 0.305: F15.1 87.38,44.87 X14.1
N$155
  Top 0.254: J14.A5 90.25,50.78 91.52,52.05 94.82,52.05 R29.2
N$156
  Top 0.254: J14.B5 87.25,51.28 86.28,52.25 82.75,52.25 R30.1
N$157  (via drill 0.35)
  Top 0.305: J15.A4B9 11.45,28.3 v11.4,28.25 | J15.B4A9 6.55,28.3 v6.6,28.25 3.12,28.25 F16.2
  Bottom 0.305: v6.6,28.25 v11.4,28.25 14.2,28.25 14.62,27.82 E16.5
  other vias: 14.62,27
N$158
  Top 0.305: F16.1 7.38,24.87 X15.1
N$159
  Top 0.254: J15.A5 10.25,30.78 11.72,32.25 15.25,32.25 R31.2
N$160
  Top 0.254: J15.B5 7.22,29.43 7.22,31.31 6.38,32.15 2.65,32.15 R32.1
N$161  (via drill 0.35)
  Top 0.305: J16.A4B9 31.45,28.3 v31.4,28.25 | J16.B4A9 26.6,29.35 v26.6,28.25 23.12,28.25 F17.2
  Bottom 0.305: v26.6,28.25 v31.4,28.25 34.2,28.25 34.62,27.82 E17.5
  other vias: 34.62,27
N$162
  Top 0.305: F17.1 27.38,24.87 X16.1
N$163
  Top 0.254: J16.A5 30.25,30.9 31.5,32.15 35.35,32.15 R33.2
N$164
  Top 0.254: J16.B5 27.22,29.43 27.22,31.31 26.38,32.15 22.65,32.15 R34.1
N$165  (via drill 0.35)
  Top 0.305: J17.A4B9 51.45,28.3 v51.4,28.25 | J17.B4A9 46.55,28.3 v46.6,28.25 43.12,28.25 F18.2
  Bottom 0.305: v46.6,28.25 v51.4,28.25 54.2,28.25 54.62,27.82 E18.5
  other vias: 54.62,27
N$166
  Top 0.305: F18.1 47.38,24.87 X17.1
N$167
  Top 0.254: J17.A5 50.25,30.78 51.82,32.35 55.15,32.35 R35.2
N$168
  Top 0.254: J17.B5 47.22,29.43 47.22,31.31 46.18,32.35 42.85,32.35 R36.1
N$169  (via drill 0.35)
  Top 0.305: J18.A4B9 71.45,28.3 v71.4,28.25 | J18.B4A9 66.55,28.3 v66.6,28.25 63.12,28.25 F19.2
  Bottom 0.305: v66.6,28.25 v71.4,28.25 74.4,28.25 74.62,28.02 E19.5
  other vias: 74.62,27
N$170
  Top 0.305: F19.1 67.38,24.87 X18.1
N$171
  Top 0.254: J18.A5 70.25,30.8 71.8,32.35 75.15,32.35 R37.2
N$172
  Top 0.254: J18.B5 67.25,31.28 66.28,32.25 62.75,32.25 R38.1
N$173  (via drill 0.35)
  Top 0.305: J19.A4B9 91.45,28.3 v91.4,28.25 | J19.B4A9 86.55,28.3 v86.6,28.25 83.12,28.25 F20.2
  Bottom 0.305: E20.5 94.62,28.02 94.4,28.25 v91.4,28.25 v86.6,28.25
  other vias: 94.62,27
N$174
  Top 0.305: F20.1 87.38,24.87 X19.1
N$175
  Top 0.254: J19.A5 90.25,30.78 91.72,32.25 95.25,32.25 R39.2
N$176
  Top 0.254: J19.B5 87.25,31.28 86.38,32.15 82.65,32.15 R40.1
N$177  (via drill 0.35)
  Top 0.305: J20.A4B9 11.45,8.3 v11.4,8.25 | J20.B4A9 6.55,8.3 v6.6,8.25 3.12,8.25 F21.2
  Bottom 0.305: v6.6,8.25 v11.4,8.25 14.4,8.25 14.62,8.02 E21.5
  other vias: 14.62,7
N$178
  Top 0.305: F21.1 7.38,4.87 X20.1
N$179
  Top 0.254: J20.A5 10.25,10.9 11.7,12.35 15.15,12.35 R41.2
N$180
  Top 0.254: J20.B5 7.25,11.3 6.3,12.25 2.75,12.25 R42.1
N$181  (via drill 0.35)
  Top 0.305: J21.A4B9 31.45,8.3 v31.4,8.25 | J21.B4A9 26.55,8.3 v26.6,8.25 23.12,8.25 F22.2
  Bottom 0.305: v26.6,8.25 v31.4,8.25 34.2,8.25 34.62,7.82 E22.5
  other vias: 34.62,7
N$182
  Top 0.305: F22.1 27.38,4.87 X21.1
N$183
  Top 0.254: J21.A5 30.25,11.2 31.5,12.45 35.05,12.45 R43.2
N$184
  Top 0.254: J21.B5 27.25,11.5 26.3,12.45 22.95,12.45 R44.1
N$185  (via drill 0.35)
  Top 0.305: J22.A4B9 51.45,8.3 v51.4,8.25 | J22.B4A9 46.6,9.35 v46.6,8.25 43.12,8.25 F23.2
  Bottom 0.305: v46.6,8.25 v51.4,8.25 54.3,8.25 54.62,7.92 E23.5
  other vias: 54.62,7
N$186
  Top 0.305: F23.1 47.38,4.87 X22.1
N$187
  Top 0.254: J22.A5 50.25,10.9 51.7,12.35 55.15,12.35 R45.2
N$188
  Top 0.254: J22.B5 47.25,11.3 46.3,12.25 42.75,12.25 R46.1
N$189  (via drill 0.35)
  Top 0.305: J23.A4B9 71.45,8.3 v71.4,8.25 | J23.B4A9 66.55,8.3 v66.6,8.25 63.12,8.25 F24.2
  Bottom 0.305: v66.6,8.25 v71.4,8.25 74.3,8.25 74.62,7.92 E24.5
  other vias: 74.62,7
N$190
  Top 0.305: F24.1 67.38,4.87 X23.1
N$191
  Top 0.254: J23.A5 70.25,11 71.5,12.25 75.25,12.25 R47.2
N$192
  Top 0.254: J23.B5 67.25,11.28 66.28,12.25 62.75,12.25 R48.1
N$193  (via drill 0.35)
  Top 0.305: J24.A4B9 91.45,8.3 v91.4,8.25 | J24.B4A9 86.55,8.3 v86.6,8.25 83.12,8.25 F25.2
  Bottom 0.305: v86.6,8.25 v91.4,8.25 94.3,8.25 94.62,7.92 E25.5
  other vias: 94.62,7
N$194
  Top 0.305: F25.1 87.38,4.87 X24.1
N$195
  Top 0.254: J24.A5 90.25,10.8 91.5,12.05 95.45,12.05 R49.2
N$196
  Top 0.254: J24.B5 87.25,11.28 86.38,12.15 82.65,12.15 R50.1